# Altium PCB Plata_1.PcbDoc
Units mm, origin at the board's own origin, x right, y up, seen from the top; angles counter-clockwise.
Board outline 20 x 24 mm, 2 copper layers (Top Layer, Bottom Layer); 10 components, 6 nets, 20 pads, 2 vias.
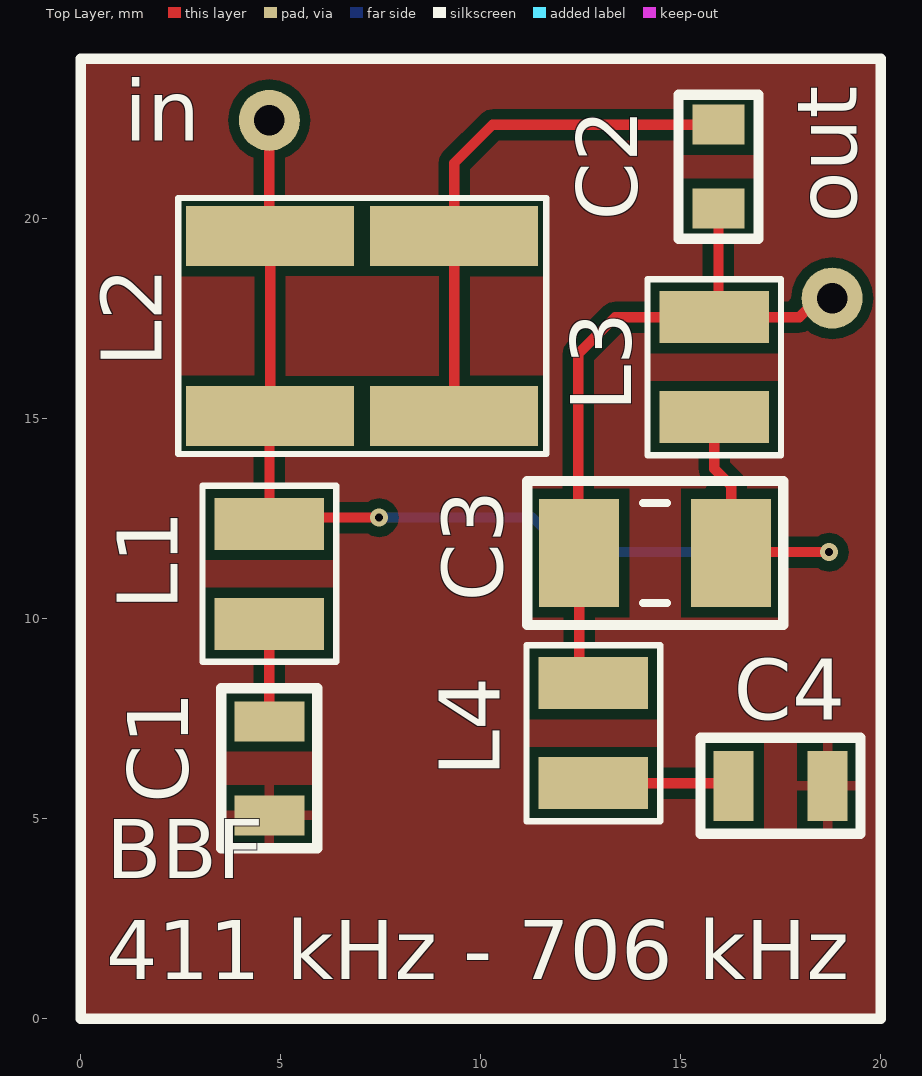
[diagram p0: Top Layer view]
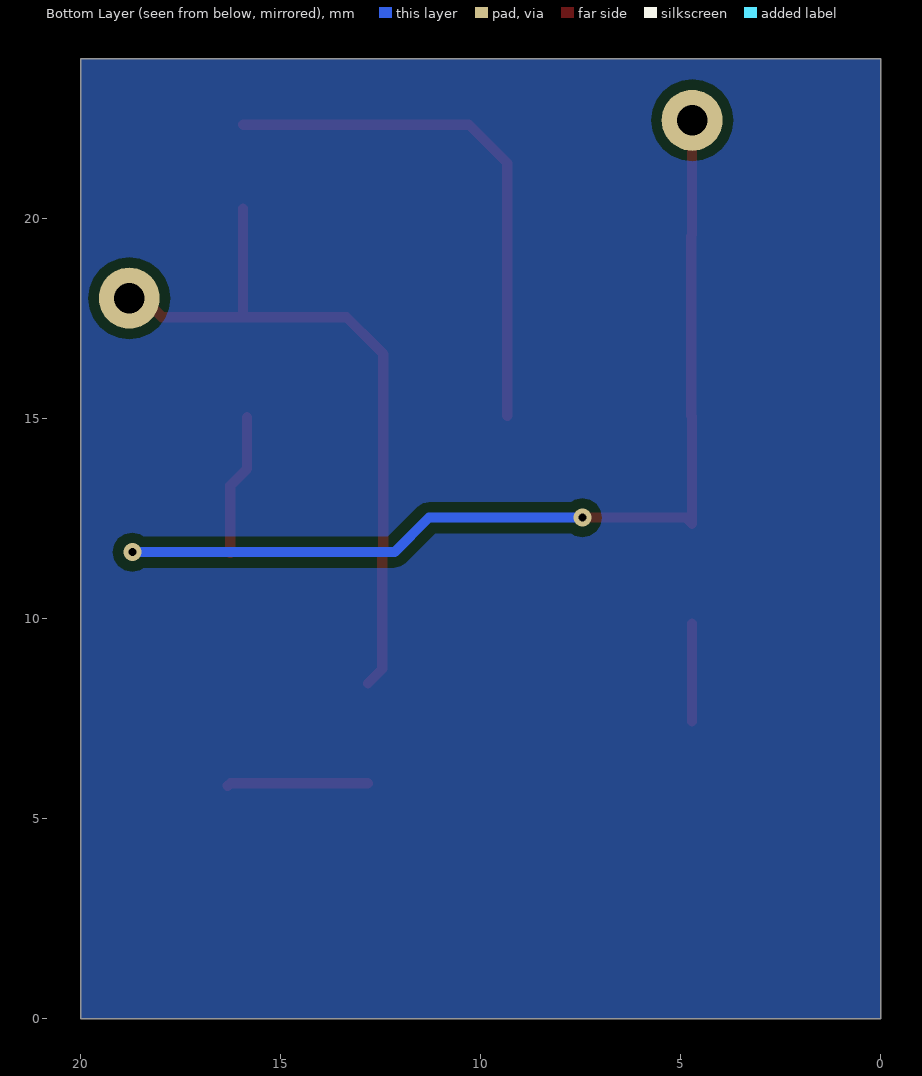
[diagram p1: Bottom Layer view, seen from below]

## Layer stack, top to bottom
Top Solder: solder mask 0.0102, Solder Resist, Dk 3.5
Top Layer: signal copper 0.0356
Dielectric 1: dielectric 0.32, FR-4, Dk 4.8
Bottom Layer: signal copper 0.0356
Bottom Solder: solder mask 0.0102, Solder Resist, Dk 3.5

## Board outline
0,0 20,0 20,24 0,24

## Design rules (kind name [scope] priority, off if disabled: settings)
Clearance [All] p1: gap=0.254 ignorepadtopadclearanceinfootprint=FALSE except(0: Arc-Hole Track-Hole SMDPad-Hole THPad-Hole Via-Hole Fill-Hole Poly-Hole Region-Hole Text-Hole)
PolygonConnect [All] p1: connectstyle=Relief reliefconductorwidth=0.254 reliefentries=4 polygonreliefangle="90 Angle" airgapwidth=0.254
RoutingVias [All] p1: holewidth=0.711 width=1.27 viastyle="Through Hole" minholewidth=0.711 minwidth=1.27 maxholewidth=0.711 maxwidth=1.27
SolderMaskExpansion [All] p1: expansion=0.102 istentingtop=FALSE
Width [All] p1: maxlimit=0.254 minlimit=0.254 preferedwidth=0.254
30 further rules are at their usual default settings.

## Classes and differential pairs
component class Sheet: C1 C3 C4 L2 L3 out xp1

## Components (designator, comment, footprint, x,y, rotation, side; value= is the part's Value field where it differs from the comment)
C1 "C1,C4" C1,C4(0805) 4.715,6.262 r270 top
C2 "C2" C2(0603) 15.942,21.3 r270 top
C3 "C3" C3(1206) 14.362,11.64 r180 top
C4 "C1,C4" C1,C4(0805) 17.498,5.823 r0 top
in "Comment" Pin 4.715,22.46 r90 top (schematic designator Pin1)
L1 "L1,L4,L3" L1,L4,L3 4.718,11.123 r270 top
L2 "L2" L2 7.038,17.319 r270 top
L3 "L1,L4,L3" L1,L4,L3 15.84,16.288 r270 top
L4 "L1,L4,L3" L1,L4,L3 12.818,7.139 r90 top
out "Pin" Pin 18.787,18.015 r90 top (schematic designator Pin2)

## Footprints (in the part's own frame and the unit in brackets; to place one, negate y for a bottom-side part, rotate by r counter-clockwise, add the part's x,y. Pads: shape width x height; smd on the part's side, far side on the other; paste and mask are expansions set on the pad)
C1,C4(0805) [mm] "Chip Capacitor, 2-Leads, Body 2,00x1,25mm, IPC Medium Density"
  rect 1x1.75 smd: 1(-1.175,0) 2(1.175,0)
  silkscreen extent -2,-1.2 2,1.2, body extent -1.1,-0.67 1.1,0.67, height 1.3
C2(0603) [mm] "Chip Capacitor, 2-Leads, Body 1,60x0,81mm, IPC Medium Density"
  rect 1x1.3 smd: 1(-1.05,0) 2(1.05,0)
  silkscreen extent -1.8,-1 1.8,1, body extent -0.87,-0.48 0.87,0.48, height 1.3
C3(1206) [mm] "Chip Capacitor, 2-Leads, Body 3,20x1,60mm, IPC Medium Density"
  rect 2x2.7 smd: 1(-1.9,0) 2(1.9,0)
  silkscreen extent -3.2,-1.8 3.2,1.8, body extent -1.75,-0.95 1.75,0.95, height 1.3
L1,L4,L3 [mm]
  rect 1.3x2.74 smd: 1(1.25,0) 2(-1.25,0)
  silkscreen extent -2.2,-1.67 2.2,1.67
L2 [mm]
  rect 1.5x4.2 smd: 1(-2.25,-2.3) 2(-2.25,2.3) 3(2.25,-2.3) 4(2.25,2.3)
  silkscreen extent -3.2,-4.6 3.2,4.6
Pin [mil]
  round 60 hole 30: 1(0,0)

## Part data
in: library part Pin

## Via types
v1: diameter 0.45, hole 0.2, Top Layer to Bottom Layer, tented both sides, 2 vias

## Nets (pads, with @x,y where several pads share a name; then routed paths per layer and width w, separated by ;. In a path a pad name is that pad's centre, name@x,y a point inside that pad or via, vN(x,y) a via of type N, cw(c..) or ccw(c..) an arc to the next point about the centre after c; other vN are vias at no path point)
GND: C1.2 C4.2
NetC1_1: C1.1 L1.1 | length 2.4
  Top Layer w0.254: C1.1 4.715,9.87 L1.1
NetC2_1: C2.1 L2.2 L2.4 | length 13.3
  Top Layer w0.254: L2.4 L2.2 9.338,21.393 10.295,22.35 C2.1
NetC2_2: C2.2 C3.2 L3.2 L4.1 out.1 | length 18.1
  Top Layer w0.254: L4.1 12.462,8.744 C3.2 12.437,11.665 12.437,16.622 12.585,16.771 12.589,16.771 13.356,17.538 L3.2 ; C2.2 15.942,17.64 L3.2 ; out.1 18.443,18.015 17.966,17.538 L3.2
NetC3_1: C3.1 in.1 L1.2 L2.1 L2.3 L3.1 | length 30.6
  Top Layer w0.254: in.1 4.715,19.592 L2.1 L2.3 4.718,15.049 L1.2 4.874,12.529 v1(7.458,12.529) ; L3.1 15.84,13.748 16.262,13.326 C3.1 16.287,11.665 v1(18.71,11.665)
  Bottom Layer w0.254: v1(7.458,12.529) 11.294,12.529 12.157,11.665 v1(18.71,11.665)
NetC4_1: C4.1 L4.2 | length 3.5
  Top Layer w0.254: L4.2 16.257,5.889 C4.1

## Polygon pours and split planes (outlines as drawn)
no net on Top Overlay "NONET_L-01_P-001" (solid): 0,24
GND on Top Layer "GND_L01_P000" (solid, pour order 0): 0,24 0,0 20,0 20,24
GND on Top Layer "GND_L01_P001" (solid, pour order 1): 435,-19.5
GND on Bottom Layer "GND_L02_P002" (solid, pour order 2): 0,24 0,0 20,0 20,24

## Silkscreen, mask and mechanical layers (free items; w line width, h text height)
Top Overlay:
  the board outline again, w0.254
  text "BBF / 411 kHz - 706 kHz" at 0.637,0.5 h2.52